# EAGLE board KH3-Transmitter-Breakout (EAGLE 7.5.0)
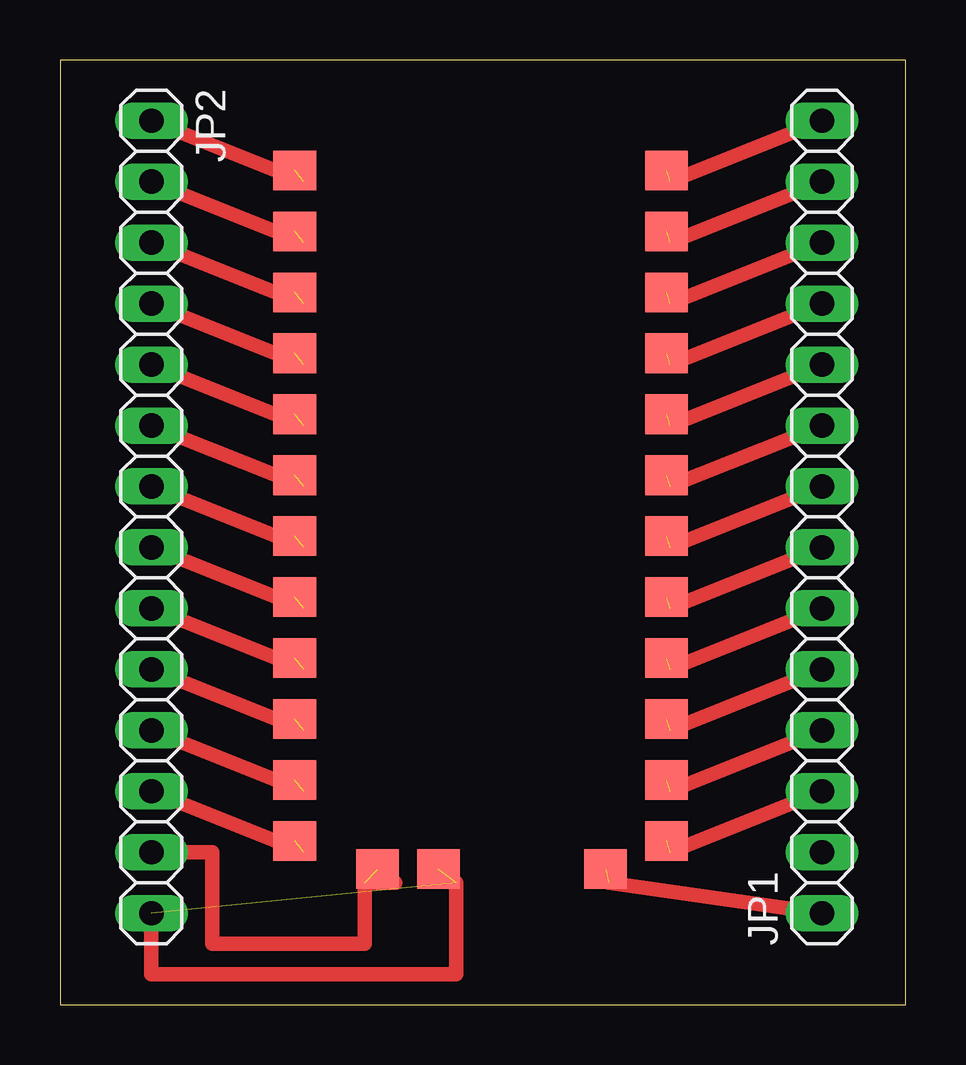
[diagram p0: board, top side]

Size 35.23 x 39.36 mm. Coordinates in mm from the lower left corner, seen from the top.
Outline: 0,0 35.23,0 35.23,39.36 0,39.36 0,0
Copper layers (1*16): Top 0.035mm / dielectric 1.5mm / Bottom 0.035mm
Design rules "default": minimum track width 10mil, minimum drill 24mil, track to track 8mil, track to pad 8mil, pad to pad 8mil, via to via 8mil, smd to smd 8mil, copper to edge 40mil, drill to drill 8mil, minimum pad ring 10mil, minimum via ring 8mil, stop-mask expansion 4mil, vias tented up to drill 0mil, thermal gap 10mil

## Footprints (pad centres in the part's own frame; a part is rotated, then mirrored left to right if it is on the bottom)
1X14 = drill 1.016 long: 1 -16.51,0; 2 -13.97,0; 3 -11.43,0; 4 -8.89,0; 5 -6.35,0; 6 -3.81,0; 7 -1.27,0; 8 1.27,0; 9 3.81,0; 10 6.35,0; 11 8.89,0; 12 11.43,0; 13 13.97,0; 14 16.51,0
LINX-KH3-TRANSMITTER = smd 1.78 x 1.65: 1 -8,14.44; 2 -8,11.9; 3 -8,9.36; 4 -8,6.82; 5 -8,4.28; 6 -8,1.74; 7 -8,-0.8; 8 -8,-3.34; 9 -8,-5.88; 10 -8,-8.42; 11 -8,-10.96; 12 -8,-13.5; 13 -4.55,-14.67; 14 -2.01,-14.67; 15 4.95,-14.67; 16 7.49,-13.5; 17 7.49,-10.96; 18 7.49,-8.42; 19 7.49,-5.88; 20 7.49,-3.34; 21 7.49,-0.8; 22 7.49,1.74; 23 7.49,4.28; 24 7.49,6.82; 25 7.49,9.36; 26 7.49,11.9; 27 7.49,14.44

## Placement (x,y rotation side)
JP1  [1X14]  31.75,20.32 90 top
JP2  [1X14]  3.81,20.32 270 top
U$1  LINX-KH3-TRANSMITTER  [LINX-KH3-TRANSMITTER]  17.78,20.32 0 top

## Library data of the parts
JP1 JP2 = pinhead
U$1 = Linx-KH3-Transmitter

## Nets
N$1: JP2.1 U$1.1
N$2: JP2.2 U$1.2
N$3: JP2.3 U$1.3
N$4: JP2.4 U$1.4
N$5: JP2.5 U$1.5
N$6: JP2.6 U$1.6
N$7: JP2.7 U$1.7
N$8: JP2.8 U$1.8
N$9: JP2.9 U$1.9
N$10: JP2.10 U$1.10
N$11: JP2.11 U$1.11
N$12: JP2.12 U$1.12
N$14: JP2.14 U$1.14
N$15: JP1.14 U$1.27
N$16: JP1.13 U$1.26
N$17: JP1.12 U$1.25
N$18: JP1.11 U$1.24
N$19: JP1.10 U$1.23
N$20: JP1.9 U$1.22
N$21: JP1.8 U$1.21
N$22: JP1.7 U$1.20
N$23: JP1.6 U$1.19
N$24: JP1.5 U$1.18
N$25: JP1.4 U$1.17
N$26: JP1.3 U$1.16
N$27: JP1.1 U$1.15
N$28: JP2.13 U$1.13

## Tracks (layer width: path | path; a pad name or v marks a point on that pad's centre or on a via)
N$1  (1 unrouted)
  Top 0.61: 10.16,34.29 JP2.1
N$2  (1 unrouted)
  Top 0.61: 10.16,31.75 JP2.2
N$3  (1 unrouted)
  Top 0.61: 10.16,29.21 JP2.3
N$4  (1 unrouted)
  Top 0.61: 10.16,26.67 JP2.4
N$5  (1 unrouted)
  Top 0.61: 10.16,24.13 JP2.5
N$6  (1 unrouted)
  Top 0.61: 10.16,21.59 JP2.6
N$7  (1 unrouted)
  Top 0.61: 10.16,19.05 JP2.7
N$8  (1 unrouted)
  Top 0.61: 10.16,16.51 JP2.8
N$9  (1 unrouted)
  Top 0.61: 10.16,13.97 JP2.9
N$10  (1 unrouted)
  Top 0.61: 10.16,11.43 JP2.10
N$11  (1 unrouted)
  Top 0.61: 10.16,8.89 JP2.11
N$12  (1 unrouted)
  Top 0.61: 10.16,6.35 JP2.12
N$14  (2 unrouted)
  Top 0.61: 16.51,5.08 16.51,1.27 3.81,1.27 JP2.14
N$15  (1 unrouted)
  Top 0.61: 25.4,34.29 JP1.14
N$16  (1 unrouted)
  Top 0.61: 25.4,31.75 JP1.13
N$17  (1 unrouted)
  Top 0.61: 25.4,29.21 JP1.12
N$18  (1 unrouted)
  Top 0.61: 25.4,26.67 JP1.11
N$19  (1 unrouted)
  Top 0.61: 25.4,24.13 JP1.10
N$20  (1 unrouted)
  Top 0.61: 25.4,21.59 JP1.9
N$21  (1 unrouted)
  Top 0.61: 25.4,19.05 JP1.8
N$22  (1 unrouted)
  Top 0.61: 25.4,16.51 JP1.7
N$23  (1 unrouted)
  Top 0.61: 25.4,13.97 JP1.6
N$24  (1 unrouted)
  Top 0.61: 25.4,11.43 JP1.5
N$25  (1 unrouted)
  Top 0.61: 25.4,8.89 JP1.4
N$26  (1 unrouted)
  Top 0.61: 25.4,6.35 JP1.3
N$27  (1 unrouted)
  Top 0.61: 22.86,5.08 JP1.1
N$28  (1 unrouted)
  Top 0.61: 13.97,5.08 12.7,5.08 12.7,2.54 6.35,2.54 6.35,6.35 JP2.13